# Altium PCB Digital_Input_PCB.PcbDoc (part 3 of 3)
Units mil, origin at the board's own origin, x right, y up, seen from the top; angles counter-clockwise.
Board outline 5600 x 4000 mil, 4 copper layers (Top Layer, Plane(Gnd), Plane(Power), Bottom Layer), stack 23.756 mil thick; 260 components, 287 nets, 712 pads, 291 vias.
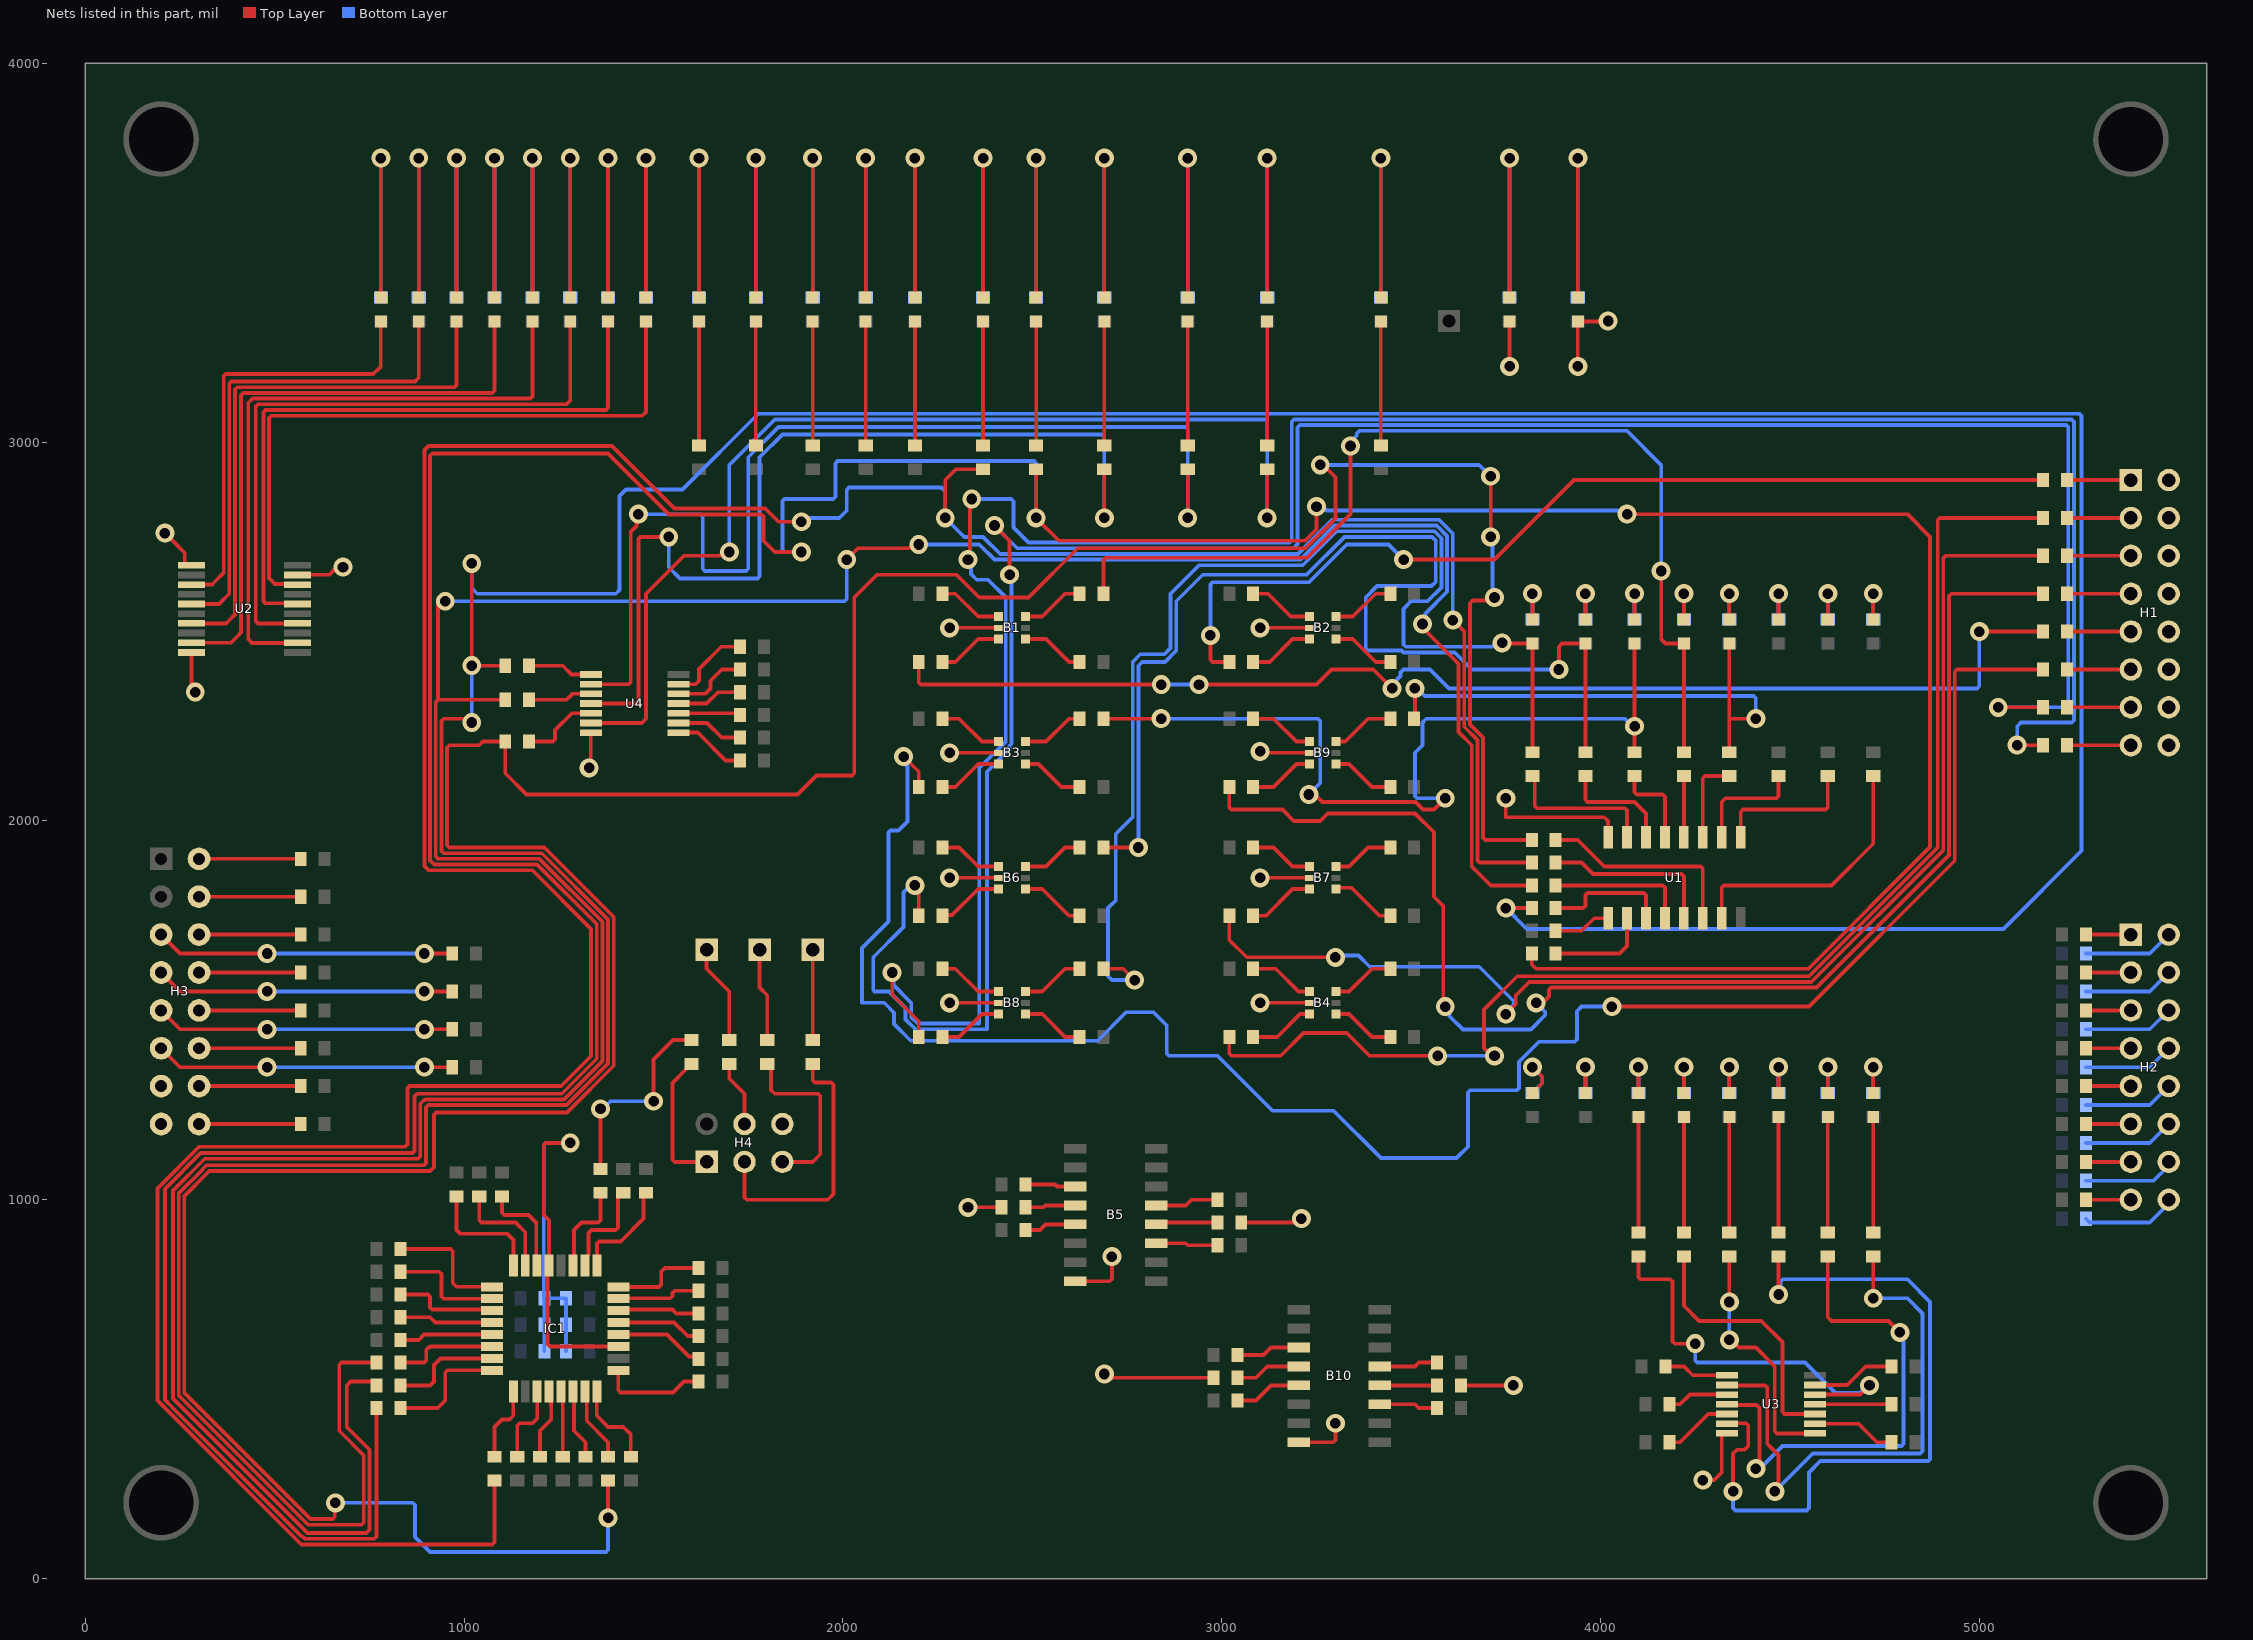
[diagram p4: the nets of this part, all layers, seen from the top]

## Via types
v1: diameter 50, hole 28, Top Layer to Bottom Layer, 291 vias

## Nets (pads, with @x,y where several pads share a name; then routed paths per layer and width w, separated by ;. In a path a pad name is that pad's centre, name@x,y a point inside that pad or via, vN(x,y) a via of type N, cw(c..) or ccw(c..) an arc to the next point about the centre after c; other vN are vias at no path point) (continued)
Digital_Input_Source_3: LED13.1 R62.2 R116.2 | length 1402.7
  Top Layer w10: R62.2@3507.99,2270 3510,2272.01 v1(3510,2350) ; R116.2@4340,2181.5 4340,2270 ; LED13.1@4340,2468.5 4340,2270 ; v1(4410,2270) 4340,2270
  Bottom Layer w10: v1(3510,2350) 3515.86,2350 3535.86,2330 4404.14,2330 4410,2324.14 v1(4410,2270)
Digital_Input_Source_4: LED12.1 R15.2 R118.2 | length 2666.4
  Top Layer w10: R15.2@2687.99,2600 2687.99,2689.14 2693.85,2695 3225,2695 3340,2810 v1(3340,2990) ; v1(4160,2660) 4160,2480 4171.5,2468.5 LED12.1@4220,2468.5 R118.2@4220,2181.5
  Bottom Layer w10: v1(3340,2990) 3340,3000.82 3356.57,3017.39 3356.57,3022.93 3363.64,3030 4070,3030 4160,2940 v1(4160,2660)
Digital_Input_Source_5: LED11.1 R39.2 R120.2 | length 2314.3
  Top Layer w10: R39.2@2687.99,2270 v1(2840,2270) ; v1(3230,2070) 3237.65,2062.35 3253.51,2062.35 3265.86,2050 3511.21,2050 3531.21,2030 3560,2030 v1(3590,2060) ; R120.2@4090,2181.5 LED11.1@4090,2468.5
  Bottom Layer w10: v1(2840,2270) 3254.14,2270 3260,2264.14 3260,2100 v1(3230,2070) ; v1(3590,2060) 3515.86,2060 3510,2065.86 3510,2180 3530,2200 3530,2260 3540,2270 4064.14,2270 4084.14,2250 v1(4090,2250)
Digital_Input_Source_6: LED10.1 R49.2 R122.2 | length 2981.9
  Top Layer w10: R49.2@2687.99,1930 2760,1930 2765.86,1935.86 2774.14,1935.86 v1(2780,1930) ; v1(3890,2400) 3890,2460 3898.5,2468.5 LED10.1@3960,2468.5 R122.2@3960,2181.5
  Bottom Layer w10: v1(2780,1930) 2780,2410 2790,2420 2850,2420 2880,2450 2880,2580 2950,2650 3223.64,2650 3323.64,2750 3555.15,2750 3565,2740.15 3565,2630.86 3554.14,2620 3410,2620 3380,2590 3380,2455.86 3385.86,2450 3474.64,2450 3479.64,2445 3615,2445 3660,2400 v1(3890,2400)
Digital_Input_Source_7: LED9.1 R61.2 R123.2 | length 3057
  Top Layer w10: R61.2@2687.99,1610 2740,1610 v1(2770,1580) ; v1(3740,2470) 3741.5,2468.5 LED9.1@3820,2468.5 R123.2@3820,2181.5
  Bottom Layer w10: v1(2770,1580) 2710,1580 2700,1590 2700,1770 2720,1790 2720,1965.43 2765,2010.43 2765,2420 2785,2440 2848.79,2440 2865,2456.21 2865,2600 2940,2675 3213.79,2675 3303.79,2765 3561.36,2765 3580,2746.36 3580,2616.46 3543.54,2580 3500,2580 3480,2560 3480,2465.86 3485.86,2460 3714.14,2460 3716.49,2462.35 3732.35,2462.35 v1(3740,2470)
GND: B1.2 B2.2 B3.2 B4.2 B5.8 B6.2 B7.2 B8.2 B9.2 B10.8 C1.2 C2.2 C3.2 C4.2 C5.2 C6.2 H1.2 H1.4 H1.6 H1.8 H1.10 H1.12 H1.14 H1.16 H3.13 H3.15 H4.6 IC1.19 IC1.29 LED25.1 LED26.1 R53.2 R54.2 R67.2 R68.2 U1.8 U2.1 U2.10 U2.19 U3.7 U4.7 | length 4954.2
  Top Layer w10: v1@227.16,2742.84 262.24,2707.76 262.24,2679.02 266.09,2675.16 U2.1@280.24,2675.16 ; U2.10@280.24,2444.84 280.24,2360.59 290,2350.82 v1(290,2340) ; U2.19@559.76,2649.57 560.2,2650 644.14,2650 656.49,2662.35 672.35,2662.35 v1(680,2670) ; v1(1280,1150) 1215.86,1150 1210,1144.14 1210,960 1224.25,945.75 IC1.29@1224.25,826.85 1220,822.6 1220,618.61 1225.86,612.76 IC1.19@1406.85,612.76 ; v1(1330,2140) 1334.33,2144.33 U4.7@1334.33,2233.23 ; v1@2266.5,1520 v1(2281.5,1520) B8.2@2411.06,1520 ; v1(2281.5,1850) B6.2@2411.06,1850 ; v1(2281.5,2180) B3.2@2411.06,2180 ; v1(2281.5,2510) B1.2@2411.06,2510 ; v1(2330,980) R53.2@2418.5,980 ; B5.8@2613.23,785 2704.14,785 2710,790.86 v1(2710,850) ; v1(2690,540) 2700.82,540 2710.82,530 R67.2@2978.5,530 ; R54.2@3051.5,940 3190,940 3190.86,939.14 3201.72,950 v1(3210,950) ; v1@3086.5,1850 v1(3101.5,1850) B7.2@3231.06,1850 ; v1(3101.5,1520) B4.2@3231.06,1520 ; v1(3101.5,2183.7) 3105.2,2180 B9.2@3231.06,2180 ; v1(3101.5,2510) B2.2@3231.06,2510 ; B10.8@3200,360 3294.14,360 3300,365.86 v1(3300,410) ; R68.2@3631.5,510 v1(3770,510) ; v1(3750,2060) 3750,2010 4010,2010 4020,2000 U1.8@4020,1956.77 ; v1(3760,3200) LED26.1@3760,3318.5 ; v1(3940,3200) LED25.1@3940,3318.5 4008.5,3318.5 4010,3320 v1(4020,3320) ; v1(4270,260) 4300,260 4320,280 4320,379.37 4323.86,383.23 U3.7@4334.33,383.23
  Bottom Layer w10: C5.2@1211.5,600 C3.2@1211.5,670 C4.2@1211.5,740 ; C2.2@1268.5,600 C6.2@1268.5,670 C1.2@1268.5,740 C4.2@1211.5,740 ; v1(1280,1150) 1215.86,1150 1210,1144.14 1210,741.5 C4.2@1211.5,740
  other v1: 210,2760
NetB1_1: B1.1 R11.1 | length 173.1
  Top Layer w10: R11.1@2262.99,2600 2296.5,2600 2356.97,2539.53 B1.1@2411.06,2539.53
NetB1_3: B1.3 R9.1 | length 173.1
  Top Layer w10: R9.1@2262.99,2420 2296.5,2420 2356.97,2480.47 B1.3@2411.06,2480.47
NetB1_4: B1.4 R13.2 | length 168.1
  Top Layer w10: B1.4@2481.93,2480.47 2536.02,2480.47 2596.5,2420 R13.2@2625,2420
NetB1_6: B1.6 R15.1 | length 168.1
  Top Layer w10: B1.6@2481.93,2539.53 2526.02,2539.53 2586.5,2600 R15.1@2625,2600
NetB2_1: B2.1 R12.1 | length 173.1
  Top Layer w10: R12.1@3082.99,2600 3122.35,2600 3182.35,2540 3230.59,2540 B2.1@3231.06,2539.53
NetB2_3: B2.3 R10.1 | length 173.1
  Top Layer w10: R10.1@3082.99,2420 3126.5,2420 3186.97,2480.47 B2.3@3231.06,2480.47
NetB2_4: B2.4 R14.2 | length 168.1
  Top Layer w10: B2.4@3301.93,2480.47 3346.02,2480.47 3406.5,2420 R14.2@3445,2420
NetB2_6: B2.6 R16.1 | length 168.1
  Top Layer w10: B2.6@3301.93,2539.53 3346.02,2539.53 3406.5,2600 R16.1@3445,2600
NetB3_1: B3.1 R35.1 | length 173.1
  Top Layer w10: R35.1@2262.99,2270 2306.5,2270 2366.97,2209.53 B3.1@2411.06,2209.53
NetB3_3: B3.3 R31.1 | length 173.1
  Top Layer w10: R31.1@2262.99,2090 2296.5,2090 2356.97,2150.47 B3.3@2411.06,2150.47
NetB3_4: B3.4 R37.2 | length 168.1
  Top Layer w10: B3.4@2481.93,2150.47 2516.02,2150.47 2576.5,2090 R37.2@2625,2090
NetB3_6: B3.6 R39.1 | length 168.1
  Top Layer w10: B3.6@2481.93,2209.53 2536.02,2209.53 2596.5,2270 R39.1@2625,2270
NetB4_1: B4.1 R36.1 | length 173.1
  Top Layer w10: R36.1@3082.99,1610 3093.74,1610 3142.35,1610 3202.83,1549.53 B4.1@3231.06,1549.53
NetB4_3: B4.3 R32.1 | length 173.1
  Top Layer w10: R32.1@3082.99,1430 3146.5,1430 3206.97,1490.47 B4.3@3231.06,1490.47
NetB4_4: B4.4 R38.2 | length 168.1
  Top Layer w10: B4.4@3301.93,1490.47 3336.02,1490.47 3396.5,1430 R38.2@3445,1430
NetB4_6: B4.6 R40.1 | length 168.1
  Top Layer w10: B4.6@3301.93,1549.53 3336.02,1549.53 3396.5,1610 R40.1@3445,1610
NetB5_3: B5.3 R41.2 | length 133.8
  Top Layer w10: R41.2@2481.5,1040 2560,1040 2565,1035 B5.3@2613.23,1035
NetB5_4: B5.4 R53.1 | length 133.8
  Top Layer w10: R53.1@2481.5,980 2530,980 2535,985 B5.4@2613.23,985
NetB5_5: B5.5 R46.2 | length 137.9
  Top Layer w10: R46.2@2481.5,920 2520,920 2535,935 B5.5@2613.23,935
NetB5_11: B5.11 R51.2 | length 163.8
  Top Layer w10: B5.11@2826.77,885 2905,885 2910,880 R51.2@2988.5,880
NetB5_12: B5.12 R54.1 | length 163.8
  Top Layer w10: B5.12@2826.77,935 2831.77,940 R54.1@2988.5,940
NetB5_13: B5.13 R52.2 | length 167.9
  Top Layer w10: B5.13@2826.77,985 2905,985 2920,1000 R52.2@2988.5,1000
NetB6_1: B6.1 R44.1 | length 169
  Top Layer w10: R44.1@2262.99,1930 2306.5,1930 2356.97,1879.53 B6.1@2411.06,1879.53
NetB6_3: B6.3 R42.1 | length 177.3
  Top Layer w10: R42.1@2262.99,1750 2264.38,1751.39 2287.88,1751.39 2356.97,1820.47 B6.3@2411.06,1820.47
NetB6_4: B6.4 R47.2 | length 172.3
  Top Layer w10: B6.4@2481.93,1820.47 2526.02,1820.47 2596.5,1750 R47.2@2625,1750
NetB6_6: B6.6 R49.1 | length 164
  Top Layer w10: B6.6@2481.93,1879.53 2536.02,1879.53 2586.5,1930 R49.1@2625,1930
NetB7_1: B7.1 R45.1 | length 169
  Top Layer w10: R45.1@3082.99,1930 3136.5,1930 3186.97,1879.53 B7.1@3231.06,1879.53
NetB7_3: B7.3 R43.1 | length 177.3
  Top Layer w10: R43.1@3082.99,1750 3116.5,1750 3186.97,1820.47 B7.3@3231.06,1820.47
NetB7_4: B7.4 R48.2 | length 174.9
  Top Layer w10: B7.4@3301.93,1820.47 3305.07,1823.61 3342.88,1823.61 3416.5,1750 R48.2@3445,1750
NetB7_6: B7.6 R50.1 | length 164
  Top Layer w10: B7.6@3301.93,1879.53 3336.02,1879.53 3386.5,1930 R50.1@3445,1930
NetB8_1: B8.1 R57.1 | length 173.1
  Top Layer w10: R57.1@2262.99,1610 2296.5,1610 2356.97,1549.53 B8.1@2411.06,1549.53
NetB8_3: B8.3 R55.1 | length 173.1
  Top Layer w10: R55.1@2262.99,1430 2306.5,1430 2366.97,1490.47 B8.3@2411.06,1490.47
NetB8_4: B8.4 R59.2 | length 168.1
  Top Layer w10: B8.4@2481.93,1490.47 2526.02,1490.47 2586.5,1430 R59.2@2625,1430
NetB8_6: B8.6 R61.1 | length 168.1
  Top Layer w10: B8.6@2481.93,1549.53 2526.02,1549.53 2586.5,1610 R61.1@2625,1610
NetB9_1: B9.1 R58.1 | length 173.1
  Top Layer w10: R58.1@3082.99,2270 3136.5,2270 3196.97,2209.53 B9.1@3231.06,2209.53
NetB9_3: B9.3 R56.1 | length 173.1
  Top Layer w10: R56.1@3082.99,2090 3136.5,2090 3196.97,2150.47 B9.3@3231.06,2150.47
NetB9_4: B9.4 R60.2 | length 168.1
  Top Layer w10: B9.4@3301.93,2150.47 3336.02,2150.47 3396.5,2090 R60.2@3445,2090
NetB9_6: B9.6 R62.1 | length 168.1
  Top Layer w10: B9.6@3301.93,2209.53 3326.02,2209.53 3386.5,2270 R62.1@3445,2270
NetB10_3: B10.3 R63.2 | length 166.8
  Top Layer w10: R63.2@3041.5,590 3110,590 3130,610 B10.3@3200,610
NetB10_4: B10.4 R67.1 | length 174.2
  Top Layer w10: R67.1@3041.5,530 3090,530 3120,560 B10.4@3203.23,560
NetB10_5: B10.5 R64.2 | length 178.3
  Top Layer w10: R64.2@3041.5,470 3090,470 3130,510 B10.5@3203.23,510
NetB10_11: B10.11 R65.2 | length 159.1
  Top Layer w10: B10.11@3413.54,460 3510,460 3520,450 R65.2@3568.5,450
NetB10_12: B10.12 R68.1 | length 155
  Top Layer w10: B10.12@3413.54,510 R68.1@3568.5,510
NetB10_13: B10.13 R66.2 | length 159.1
  Top Layer w10: B10.13@3413.54,560 3510,560 3520,570 R66.2@3568.5,570
NetH1_1: H1.1 R1.2 | length 168.5
  Top Layer w10: R1.2@5231.5,2900 H1.1@5400,2900
NetH1_3: H1.3 R2.2 | length 168.5
  Top Layer w10: R2.2@5231.5,2800 H1.3@5400,2800
NetH1_5: H1.5 R3.2 | length 168.5
  Top Layer w10: R3.2@5231.5,2700 H1.5@5400,2700
NetH1_7: H1.7 R4.2 | length 168.5
  Top Layer w10: R4.2@5231.5,2600 H1.7@5400,2600
NetH1_9: H1.9 R5.2 | length 168.5
  Top Layer w10: R5.2@5231.5,2500 H1.9@5400,2500
NetH1_11: H1.11 R6.2 | length 168.5
  Top Layer w10: R6.2@5231.5,2400 H1.11@5400,2400
NetH1_13: H1.13 R7.2 | length 168.5
  Top Layer w10: R7.2@5231.5,2300 H1.13@5400,2300
NetH1_15: H1.15 R8.2 | length 168.5
  Top Layer w10: R8.2@5231.5,2200 H1.15@5400,2200
NetH2_1: H2.1 R17.2 | length 118.5
  Top Layer w10: R17.2@5281.5,1700 H2.1@5400,1700
NetH2_2: H2.2 R18.1 | length 239.2
  Bottom Layer w10: R18.1@5281.5,1650 5450,1650 H2.2@5500,1700
NetH2_3: H2.3 R19.2 | length 118.5
  Top Layer w10: R19.2@5281.5,1600 H2.3@5400,1600
NetH2_4: H2.4 R20.1 | length 239.2
  Bottom Layer w10: R20.1@5281.5,1550 5450,1550 H2.4@5500,1600
NetH2_5: H2.5 R21.2 | length 118.5
  Top Layer w10: R21.2@5281.5,1500 H2.5@5400,1500
NetH2_6: H2.6 R22.1 | length 239.2
  Bottom Layer w10: R22.1@5281.5,1450 5450,1450 H2.6@5500,1500
NetH2_7: H2.7 R23.2 | length 118.5
  Top Layer w10: R23.2@5281.5,1400 H2.7@5400,1400
NetH2_8: H2.8 R24.1 | length 239.2
  Bottom Layer w10: R24.1@5281.5,1350 5450,1350 H2.8@5500,1400
NetH2_9: H2.9 R25.2 | length 118.5
  Top Layer w10: R25.2@5281.5,1300 H2.9@5400,1300
NetH2_10: H2.10 R26.1 | length 239.2
  Bottom Layer w10: R26.1@5281.5,1250 5450,1250 H2.10@5500,1300
NetH2_11: H2.11 R27.2 | length 118.5
  Top Layer w10: R27.2@5281.5,1200 H2.11@5400,1200
NetH2_12: H2.12 R28.1 | length 239.2
  Bottom Layer w10: R28.1@5281.5,1150 5450,1150 H2.12@5500,1200
NetH2_13: H2.13 R29.2 | length 118.5
  Top Layer w10: R29.2@5281.5,1100 H2.13@5400,1100
NetH2_14: H2.14 R30.1 | length 245.1
  Bottom Layer w10: R30.1@5281.5,1050 5460,1050 5500,1090 H2.14@5500,1100
NetH2_15: H2.15 R33.2 | length 118.5
  Top Layer w10: R33.2@5281.5,1000 H2.15@5400,1000
NetH2_16: H2.16 R34.1 | length 262.5
  Bottom Layer w10: R34.1@5281.5,950 5291.5,940 5450,940 5500,990 H2.16@5500,1000 H2.16@5493.51,993.51
NetH3_2: H3.2 R69.2 | length 268.5
  Top Layer w10: H3.2@300,1900 R69.2@568.5,1900
NetH3_4: H3.4 R71.2 | length 268.5
  Top Layer w10: H3.4@300,1800 R71.2@568.5,1800
NetH3_5: H3.5 R75.1 | length 789.2
  Top Layer w10: H3.5@200,1700 250,1650 v1(480,1650) ; v1(895,1650) R75.1@968.5,1650
  Bottom Layer w10: v1(480,1650) v1(895,1650)
NetH3_6: H3.6 R74.2 | length 268.5
  Top Layer w10: H3.6@300,1700 R74.2@568.5,1700
NetH3_7: H3.7 R78.1 | length 789.9
  Top Layer w10: H3.7@200,1600 250,1550 460,1550 460.86,1549.14 469.14,1549.14 470,1550 v1(480,1550) ; v1(895,1550) R78.1@968.5,1550
  Bottom Layer w10: v1(480,1550) v1(895,1550)
NetH3_8: H3.8 R77.2 | length 268.5
  Top Layer w10: H3.8@300,1600 R77.2@568.5,1600
NetH3_9: H3.9 R80.1 | length 789.2
  Top Layer w10: H3.9@200,1500 250,1450 v1(480,1450) ; v1(895,1450) R80.1@968.5,1450
  Bottom Layer w10: v1(480,1450) v1(895,1450)
NetH3_10: H3.10 R79.2 | length 268.5
  Top Layer w10: H3.10@300,1500 R79.2@568.5,1500
NetH3_11: H3.11 R82.1 | length 789.2
  Top Layer w10: H3.11@200,1400 250,1350 v1(480,1350) ; v1(895,1350) R82.1@968.5,1350
  Bottom Layer w10: v1(480,1350) v1(895,1350)
NetH3_12: H3.12 R81.2 | length 268.5
  Top Layer w10: H3.12@300,1400 R81.2@568.5,1400
NetH3_14: H3.14 R83.2 | length 268.5
  Top Layer w10: H3.14@300,1300 R83.2@568.5,1300
NetH3_16: H3.16 R84.2 | length 268.5
  Top Layer w10: H3.16@300,1200 R84.2@568.5,1200
NetH4_1: H4.1 R70.2 | length 367.5
  Top Layer w10: R70.2@1600,1358.5 1597.05,1358.5 1586.3,1347.76 1586.3,1344.8 1550,1308.5 1550,1105.86 1555.86,1100 H4.1@1640,1100
NetH4_3: H4.3 R72.2 | length 726.1
  Top Layer w10: H4.3@1740,1096.72 1740,1005.86 1745.86,1000 1960,1000 1975,1015 1975,1303.39 1969.14,1309.25 1925.86,1309.25 1920,1315.11 R72.2@1920,1358.5
NetH4_4: H4.4 R73.1 | length 175.1
  Top Layer w10: R73.1@1700,1358.5 1700,1320 1740,1280 H4.4@1740,1200
NetH4_5: H4.5 R76.2 | length 472.5
  Top Layer w10: R76.2@1800,1358.5 1810,1348.5 1810,1290 1820,1280 1934.14,1280 1940,1274.14 1940,1120 1920,1100 H4.5@1840,1100 ; H4.5@1829.77,1090.61 H4.5@1830.39,1090
NetIC1_1: IC1.1 R91.2 | length 332.3
  Top Layer w10: R91.2@831.5,870 964.14,870 970,864.14 970,780 979.76,770.24 IC1.1@1073.15,770.24
NetIC1_2: IC1.2 R93.2 | length 306.1
  Top Layer w10: R93.2@831.5,810 934.14,810 940,804.14 940,744.6 945.86,738.74 IC1.2@1073.15,738.74
NetIC1_3: IC1.3 R95.2 | length 275.9
  Top Layer w10: R95.2@831.5,750 904.14,750 910,744.14 910,715.86 915.86,710 1070.39,710 IC1.3@1073.15,707.24
NetIC1_4: IC1.4 R97.2 | length 247.6
  Top Layer w10: R97.2@831.5,690 910,690 924.25,675.75 IC1.4@1073.15,675.75
NetIC1_5: IC1.5 R99.2 | length 247.6
  Top Layer w10: R99.2@831.5,630 880,630 894.25,644.25 IC1.5@1073.15,644.25
NetIC1_6: IC1.6 R102.2 | length 275.9
  Top Layer w10: R102.2@831.5,570 894.14,570 900,575.86 900,604.14 905.86,610 908.28,610 911.04,612.76 IC1.6@1073.15,612.76
NetIC1_7: IC1.7 R104.2 | length 297
  Top Layer w10: R104.2@831.5,510 910,510 920,520 920,564.14 937.12,581.26 IC1.7@1073.15,581.26
NetIC1_8: IC1.8 R106.2 | length 326.3
  Top Layer w10: R106.2@831.5,450 930,450 950,470 950,543.91 955.86,549.76 IC1.8@1073.15,549.76
NetIC1_9: IC1.9 R108.2 | length 204
  Top Layer w10: R108.2@1080,321.5 1080,400 1100,420 1120,420 1129.76,429.76 IC1.9@1129.76,493.15
NetIC1_11: IC1.11 R111.1 | length 213.5
  Top Layer w10: R111.1@1140,321.5 1140,404.14 1145.86,410 1180,410 1192.76,422.76 IC1.11@1192.76,493.15
NetIC1_12: IC1.12 R110.1 | length 186.5
  Top Layer w10: R110.1@1200,321.5 1200,390 1230,420 1230,456.84 1228.94,457.9 1228.94,488.46 IC1.12@1224.25,493.15
NetIC1_13: IC1.13 R109.1 | length 173.4
  Top Layer w10: IC1.13@1255.75,493.15 1260,488.9 R109.1@1260,321.5
NetIC1_14: IC1.14 R107.1 | length 185.2
  Top Layer w10: IC1.14@1287.24,493.15 1290,490.39 1290,390 1320,360 R107.1@1320,321.5
NetIC1_15: IC1.15 R105.1 | length 197
  Top Layer w10: IC1.15@1318.74,493.15 1323.43,488.46 1323.43,416.57 1380,360 R105.1@1380,321.5
NetIC1_16: IC1.16 R103.1 | length 232.3
  Top Layer w10: IC1.16@1350.24,493.15 1350.24,429.76 1380,400 1420,400 1440,380 R103.1@1440,321.5
NetIC1_17: IC1.17 R101.1 | length 278.3
  Top Layer w10: IC1.17@1406.85,549.76 1406.85,497.35 1412.71,491.5 1551.5,491.5 1580,520 R101.1@1618.5,520
NetIC1_20: IC1.20 R100.1 | length 238.3
  Top Layer w10: IC1.20@1406.85,644.25 1535.75,644.25 1593.61,586.39 1612.12,586.39 R100.1@1618.5,580
NetIC1_21: IC1.21 R98.1 | length 226.5
  Top Layer w10: IC1.21@1406.85,675.75 1554.25,675.75 1590,640 R98.1@1618.5,640
NetIC1_22: IC1.22 R96.1 | length 216.9
  Top Layer w10: IC1.22@1406.85,707.24 1409.61,710 1550,710 1560,700 R96.1@1618.5,700
NetIC1_23: IC1.23 R94.1 | length 225.3
  Top Layer w10: IC1.23@1406.85,738.74 1408.11,740 1544.14,740 1550,745.86 1550,754.14 1555.86,760 R94.1@1618.5,760
NetIC1_24: IC1.24 R92.1 | length 252.5
  Top Layer w10: IC1.24@1406.85,770.24 1407.09,770 1514.14,770 1520,775.86 1520,810 1530,820 R92.1@1618.5,820
NetIC1_25: IC1.25 R90.1 | length 263.4
  Top Layer w10: IC1.25@1350.24,840.99 1350.61,841.36 1350.61,884.14 1356.46,890 1413.39,890 1473.61,950.23 1473.61,1010.87 R90.1@1480,1017.25
NetIC1_26: IC1.26 R88.1 | length 273.5
  Top Layer w10: IC1.26@1318.74,826.85 1318.74,844.07 1328.43,853.76 1328.43,912.57 1335.86,920 1400,920 1406.3,926.3 1406.3,1007.76 1418.54,1020 R88.1@1420,1020
NetIC1_27: IC1.27 R86.1 | length 247.6
  Top Layer w10: IC1.27@1287.24,826.85 1290,829.61 1290,920 1310,940 1354.14,940 1360,945.86 R86.1@1360,1018.5
NetIC1_30: IC1.30 R85.2 | length 257.6
  Top Layer w10: R85.2@1100,1008.5 1100,965.86 1105.86,960 1170,960 1190,940 1190,829.61 IC1.30@1192.76,826.85
NetIC1_31: IC1.31 R87.2 | length 284.3
  Top Layer w10: R87.2@1040,1008.5 1040,945.86 1045.86,940 1135.4,940 1161.26,914.14 IC1.31@1161.26,826.85
NetIC1_32: IC1.32 R89.2 | length 316.6
  Top Layer w10: R89.2@980,1008.5 980,920 990,910 1114.14,910 1130,894.14 1130,827.09 IC1.32@1129.76,826.85
NetLED1_1: LED1.1 U2.18 | length 1745.1
  Top Layer w10: U2.18@559.76,2623.98 558.03,2625.71 500.15,2625.71 490,2635.86 485,2640.86 485,3064.14 490.86,3070 1470,3070 1480,3080 LED1.1@1480,3318.5
NetLED1_2: LED1.2 R126.1 | length 737
  Top Layer w10: LED1.2@1480,3381.5 v1(1480,3750)
  Bottom Layer w10: R126.1@1480,3381.5 v1(1480,3750)
NetLED2_1: LED2.1 U2.16 | length 1734.2
  Top Layer w10: U2.16@559.76,2572.8 558.03,2574.53 475.86,2574.53 470,2580.39 470,3079.14 475.86,3085 1374.14,3085 1380,3090.86 LED2.1@1380,3318.5
NetLED2_2: LED2.2 R127.1 | length 737
  Top Layer w10: LED2.2@1380,3381.5 v1(1380,3750)
  Bottom Layer w10: R127.1@1380,3381.5 v1(1380,3750)
NetLED3_1: LED3.1 U2.14 | length 1723.9
  Top Layer w10: U2.14@559.76,2521.61 455.86,2521.61 450,2527.47 450,3094.14 455.86,3100 1270,3100 1280,3110 LED3.1@1280,3318.5
NetLED3_2: LED3.2 R128.1 | length 737
  Top Layer w10: LED3.2@1280,3381.5 v1(1280,3750)
  Bottom Layer w10: R128.1@1280,3381.5 v1(1280,3750)
NetLED4_1: LED4.1 U2.12 | length 1723.8
  Top Layer w10: U2.12@570,2472.17 567.83,2470 440,2470 430,2480 430,3104.14 440.86,3115 1174.14,3115 1180,3120.86 LED4.1@1180,3318.5
NetLED4_2: LED4.2 R129.1 | length 737
  Top Layer w10: LED4.2@1180,3381.5 v1(1180,3750)
  Bottom Layer w10: R129.1@1180,3381.5 v1(1180,3750)
NetLED5_1: LED5.1 U2.9 | length 1625.3
  Top Layer w10: U2.9@280.24,2470.43 384.14,2470.43 400,2486.29 410.86,2497.15 410.86,3124.14 416.72,3130 1074.14,3130 1080,3135.86 LED5.1@1080,3318.5
NetLED5_2: LED5.2 R130.1 | length 737
  Top Layer w10: LED5.2@1080,3381.5 v1(1080,3750)
  Bottom Layer w10: R130.1@1080,3381.5 v1(1080,3750)
NetLED6_1: LED6.1 U2.7 | length 1476.1
  Top Layer w10: U2.7@280.24,2521.61 371.61,2521.61 380,2530 395,2545 395,3139.14 400.86,3145 974.14,3145 980,3150.86 LED6.1@980,3318.5
NetLED6_2: LED6.2 R131.1 | length 737
  Top Layer w10: LED6.2@980,3381.5 v1(980,3750)
  Bottom Layer w10: R131.1@980,3381.5 v1(980,3750)
NetLED7_1: LED7.1 U2.5 | length 1320.2
  Top Layer w10: U2.5@280.24,2572.8 352.8,2572.8 356.4,2576.4 380,2600 380,3154.14 385.86,3160 870,3160 880,3170 LED7.1@880,3318.5
NetLED7_2: LED7.2 R132.1 | length 737
  Top Layer w10: LED7.2@880,3381.5 v1(880,3750)
  Bottom Layer w10: R132.1@880,3381.5 v1(880,3750)
NetLED8_1: LED8.1 U2.3 | length 1161
  Top Layer w10: U2.3@280.24,2623.98 333.98,2623.98 340,2630 365,2655 365,3174.14 370.86,3180 760,3180 780,3200 LED8.1@780,3318.5
NetLED8_2: LED8.2 R133.1 | length 737
  Top Layer w10: LED8.2@780,3381.5 v1(780,3750)
  Bottom Layer w10: R133.1@780,3381.5 v1(780,3750)
NetLED9_2: LED9.2 R134.1 | length 137
  Top Layer w10: LED9.2@3820,2531.5 v1(3820,2600)
  Bottom Layer w10: R134.1@3820,2531.5 v1(3820,2600)
NetLED10_2: LED10.2 R135.1 | length 137
  Top Layer w10: LED10.2@3960,2531.5 v1(3960,2600)
  Bottom Layer w10: R135.1@3960,2531.5 v1(3960,2600)
NetLED11_2: LED11.2 R136.1 | length 137
  Top Layer w10: LED11.2@4090,2531.5 v1(4090,2600)
  Bottom Layer w10: R136.1@4090,2531.5 v1(4090,2600)
NetLED12_2: LED12.2 R137.1 | length 137
  Top Layer w10: LED12.2@4220,2531.5 v1(4220,2600)
  Bottom Layer w10: R137.1@4220,2531.5 v1(4220,2600)
NetLED13_2: LED13.2 R138.1 | length 137
  Top Layer w10: LED13.2@4340,2531.5 v1(4340,2600)
  Bottom Layer w10: R138.1@4340,2531.5 v1(4340,2600)
NetLED14_2: LED14.2 R139.1 | length 137
  Top Layer w10: LED14.2@4470,2531.5 v1(4470,2600)
  Bottom Layer w10: R139.1@4470,2531.5 v1(4470,2600)
NetLED15_2: LED15.2 R140.1 | length 137
  Top Layer w10: LED15.2@4600,2531.5 v1(4600,2600)
  Bottom Layer w10: R140.1@4600,2531.5 v1(4600,2600)
NetLED16_2: LED16.2 R141.1 | length 127
  Top Layer w10: LED16.2@4720,2531.5 v1@4720,2590
  Bottom Layer w10: R141.1@4720,2531.5 v1(4720,2600)
NetLED17_1: LED17.1 R157.1 | length 327
  Top Layer w10: R157.1@2370,2991.5 LED17.1@2370,3318.5
NetLED17_2: LED17.2 R142.1 | length 737
  Top Layer w10: LED17.2@2370,3381.5 v1(2370,3750)
  Bottom Layer w10: R142.1@2370,3381.5 v1(2370,3750)
NetLED18_1: LED18.1 R156.1 | length 327
  Top Layer w10: R156.1@2510,2991.5 LED18.1@2510,3318.5
NetLED18_2: LED18.2 R143.1 | length 737
  Top Layer w10: LED18.2@2510,3381.5 v1(2510,3750)
  Bottom Layer w10: R143.1@2510,3381.5 v1(2510,3750)
NetLED19_1: LED19.1 R155.1 | length 327
  Top Layer w10: R155.1@3420,2991.5 LED19.1@3420,3318.5
NetLED19_2: LED19.2 R144.1 | length 737
  Top Layer w10: LED19.2@3420,3381.5 v1(3420,3750)
  Bottom Layer w10: R144.1@3420,3381.5 v1(3420,3750)
NetLED20_1: LED20.1 R154.1 | length 327
  Top Layer w10: R154.1@1770,2991.5 LED20.1@1770,3318.5
NetLED20_2: LED20.2 R145.1 | length 737
  Top Layer w10: LED20.2@1770,3381.5 v1(1770,3750)
  Bottom Layer w10: R145.1@1770,3381.5 v1(1770,3750)
NetLED21_1: LED21.1 R153.1 | length 327
  Top Layer w10: R153.1@1920,2991.5 LED21.1@1920,3318.5
NetLED21_2: LED21.2 R146.1 | length 737
  Top Layer w10: LED21.2@1920,3381.5 v1(1920,3750)
  Bottom Layer w10: R146.1@1920,3381.5 v1(1920,3750)
NetLED22_1: LED22.1 R152.1 | length 327
  Top Layer w10: R152.1@1620,2991.5 LED22.1@1620,3318.5
NetLED22_2: LED22.2 R147.1 | length 737
  Top Layer w10: LED22.2@1620,3381.5 v1(1620,3750)
  Bottom Layer w10: R147.1@1620,3381.5 v1(1620,3750)
NetLED23_1: LED23.1 R151.1 | length 327
  Top Layer w10: R151.1@2060,2991.5 LED23.1@2060,3318.5
NetLED23_2: LED23.2 R148.1 | length 737
  Top Layer w10: LED23.2@2060,3381.5 v1(2060,3750)
  Bottom Layer w10: R148.1@2060,3381.5 v1(2060,3750)
NetLED24_1: LED24.1 R150.1 | length 327
  Top Layer w10: R150.1@2190,2991.5 LED24.1@2190,3318.5
NetLED24_2: LED24.2 R149.1 | length 737
  Top Layer w10: LED24.2@2190,3381.5 v1(2190,3750)
  Bottom Layer w10: R149.1@2190,3381.5 v1(2190,3750)
NetLED25_2: LED25.2 R158.1 | length 737
  Top Layer w10: LED25.2@3940,3381.5 v1(3940,3750)
  Bottom Layer w10: R158.1@3940,3381.5 v1(3940,3750)
NetLED26_2: LED26.2 R159.1 | length 737
  Top Layer w10: LED26.2@3760,3381.5 v1(3760,3750)
  Bottom Layer w10: R159.1@3760,3381.5 v1(3760,3750)
NetLED27_2: LED27.2 R160.1 | length 181.8
  Top Layer w10: LED27.2@3820,1281.5 3846,1307.49 3846,1324 v1(3820,1350)
  Bottom Layer w10: R160.1@3820,1281.5 3822.95,1281.5 3833.7,1292.24 3833.7,1295.2 3846,1307.49 3846,1324 v1(3820,1350)
NetLED28_2: LED28.2 R161.1 | length 137
  Top Layer w10: LED28.2@3960,1281.5 v1(3960,1350)
  Bottom Layer w10: R161.1@3960,1281.5 v1(3960,1350)
NetLED29_1: LED29.1 R181.1 | length 305
  Top Layer w10: R181.1@4100,913.5 LED29.1@4100,1218.5
NetLED29_2: LED29.2 R162.1 | length 137
  Top Layer w10: LED29.2@4100,1281.5 v1(4100,1350)
  Bottom Layer w10: R162.1@4100,1281.5 v1(4100,1350)
NetLED30_1: LED30.1 R176.1 | length 305
  Top Layer w10: R176.1@4220,913.5 LED30.1@4220,1218.5
NetLED30_2: LED30.2 R163.1 | length 145.3
  Top Layer w10: LED30.2@4210,1291.5 LED30.2@4220,1281.5 ; LED30.2@4220,1291.5 v1(4220,1350)
  Bottom Layer w10: R163.1@4210,1291.5 R163.1@4220,1281.5 ; R163.1@4220,1291.5 v1(4220,1350)
NetLED31_1: LED31.1 R174.1 | length 305
  Top Layer w10: R174.1@4340,913.5 LED31.1@4340,1218.5
NetLED31_2: LED31.2 R164.1 | length 137
  Top Layer w10: LED31.2@4340,1281.5 v1(4340,1350)
  Bottom Layer w10: R164.1@4340,1281.5 v1(4340,1350)
NetLED32_1: LED32.1 R172.1 | length 305
  Top Layer w10: R172.1@4470,913.5 LED32.1@4470,1218.5
NetLED32_2: LED32.2 R165.1 | length 137
  Top Layer w10: LED32.2@4470,1281.5 v1(4470,1350)
  Bottom Layer w10: R165.1@4470,1281.5 v1(4470,1350)
NetLED33_1: LED33.1 R170.1 | length 305
  Top Layer w10: R170.1@4600,913.5 LED33.1@4600,1218.5
NetLED33_2: LED33.2 R166.1 | length 137
  Top Layer w10: LED33.2@4600,1281.5 v1(4600,1350)
  Bottom Layer w10: R166.1@4600,1281.5 v1(4600,1350)
NetLED34_1: LED34.1 R168.1 | length 305
  Top Layer w10: R168.1@4720,913.5 LED34.1@4720,1218.5
NetLED34_2: LED34.2 R167.1 | length 137
  Top Layer w10: LED34.2@4720,1281.5 v1(4720,1350)
  Bottom Layer w10: R167.1@4720,1281.5 v1(4720,1350)
NetLED35_1: LED35.1 R187.1 | length 327
  Top Layer w10: R187.1@3120,2991.5 LED35.1@3120,3318.5
NetLED35_2: LED35.2 R178.1 | length 737
  Top Layer w10: LED35.2@3120,3381.5 v1(3120,3750)
  Bottom Layer w10: R178.1@3120,3381.5 v1(3120,3750)
NetLED36_1: LED36.1 R185.1 | length 327
  Top Layer w10: R185.1@2690,2991.5 LED36.1@2690,3318.5
NetLED36_2: LED36.2 R179.1 | length 737
  Top Layer w10: LED36.2@2690,3381.5 v1(2690,3750)
  Bottom Layer w10: R179.1@2690,3381.5 v1(2690,3750)
NetLED37_1: LED37.1 R183.1 | length 327
  Top Layer w10: R183.1@2910,2991.5 LED37.1@2910,3318.5
NetLED37_2: LED37.2 R180.1 | length 737
  Top Layer w10: LED37.2@2910,3381.5 v1(2910,3750)
  Bottom Layer w10: R180.1@2910,3381.5 v1(2910,3750)
NetR72_1: R72.1 TP2.1 | length 238.5
  Top Layer w10: R72.1@1920,1421.5 TP2.1@1920,1660
NetR73_2: R73.2 TP3.1 | length 263.4
  Top Layer w10: TP3.1@1640,1660 1640,1610 1700,1550 R73.2@1700,1421.5
NetR76_1: R76.1 TP4.1 | length 246.8
  Top Layer w10: TP4.1@1780,1660 1780,1560 1800,1540 R76.1@1800,1421.5
NetR112_1: R112.1 U1.15 | length 707.4
  Top Layer w10: U1.15@4320,1743.23 4320,1824.14 4325.86,1830 4610,1830 4720,1940 R112.1@4720,2118.5
NetR113_1: R113.1 U1.1 | length 384.9
  Top Layer w10: U1.1@4370,1956.77 4370,2024.14 4375.86,2030 4594.14,2030 4600,2035.86 R113.1@4600,2118.5
NetR114_1: R114.1 U1.2 | length 302.4
  Top Layer w10: U1.2@4320,1956.77 4320,2050 4330,2060 4464.14,2060 4470,2065.86 R114.1@4470,2118.5
NetR115_2: R115.2 U1.11 | length 335
  Top Layer w10: R115.2@3881.5,1770 3954.14,1770 3960,1775.86 3960,1804.14 3965.86,1810 4114.14,1810 4120,1804.14 U1.11@4120,1743.23
NetR116_1: R116.1 U1.3 | length 228.3
  Top Layer w10: U1.3@4270,1956.77 4270,2112.65 4275.86,2118.5 R116.1@4340,2118.5
NetR117_2: R117.2 U1.12 | length 371.8
  Top Layer w10: R117.2@3881.5,1830 4164.14,1830 4170,1824.14 U1.12@4170,1743.23
NetR118_1: R118.1 U1.4 | length 161.7
  Top Layer w10: U1.4@4220,1956.77 R118.1@4220,2118.5
NetR119_2: R119.2 U1.14 | length 550.8
  Top Layer w10: R119.2@3881.5,1950 3940,1950 4010,1880 4264.14,1880 4270,1874.14 U1.14@4270,1743.23
NetR120_1: R120.1 U1.5 | length 234.9
  Top Layer w10: R120.1@4090,2118.5 4090,2075.86 4095.86,2070 4164.14,2070 4170,2064.14 U1.5@4170,1956.77
NetR121_2: R121.2 U1.13 | length 464.3
  Top Layer w10: R121.2@3881.5,1890 3950,1890 3980,1860 4214.14,1860 4220,1854.14 U1.13@4220,1743.23
NetR122_1: R122.1 U1.6 | length 300.7
  Top Layer w10: R122.1@3960,2118.5 3960,2055.86 3965.86,2050 4090,2050 4120,2020 U1.6@4120,1956.77
NetR123_1: R123.1 U1.7 | length 401.1
  Top Layer w10: R123.1@3820,2118.5 3826.39,2112.12 3826.39,2039.47 3832.24,2033.61 4064.14,2033.61 4070,2027.76 U1.7@4070,1956.77
NetR124_2: R124.2 U1.10 | length 270
  Top Layer w10: R124.2@3881.5,1650 4050,1650 4070,1670 U1.10@4070,1743.23
NetR125_1: R125.1 U1.9 | length 152.3
  Top Layer w10: R125.1@3881.5,1710 3950,1710 3983.23,1743.23 U1.9@4020,1743.23
NetR168_2: R168.2 U3.2 | length 1454.4
  Top Layer w10: U3.2@4334.33,511.18 4335.51,510 4434.14,510 4440,504.14 4440,355.86 4445.86,350 4470,325.86 4470,255.86 4467.65,253.51 4467.65,237.65 v1(4460,230) ; v1(4720,740) R168.2@4720,850.5
  Bottom Layer w10: v1(4460,230) 4560,330 4844.14,330 4850,335.86 4850,700 4810,740 v1(4720,740)
NetR169_1: R169.1 U3.1 | length 172.5
  Top Layer w10: R169.1@4171.5,560 4220,560 4243.23,536.77 U3.1@4334.33,536.77
NetR170_2: R170.2 U3.4 | length 1316.7
  Top Layer w10: U3.4@4353.46,458.27 4411.73,458.27 4420,450 4420,310.82 4410,300.82 v1(4410,290) ; R170.2@4600,850.5 4600,690 4610,680 4760,680 v1(4790,650)
  Bottom Layer w10: v1(4410,290) 4420,290 4430,300 4480,350 4794.14,350 4800,355.86 4800,624.14 4797.65,626.49 4797.65,642.35 v1(4790,650)
NetR171_1: R171.1 U3.3 | length 163.7
  Top Layer w10: R171.1@4181.5,460 4210,460 4235.86,485.86 4244.14,485.86 4244.41,485.59 U3.3@4334.33,485.59
NetR172_2: R172.2 U3.6 | length 1922.5
  Top Layer w10: U3.6@4334.33,408.82 4335.51,410 4384.14,410 4390,404.14 4390,350 4380,340 4360,340 4350,330 v1(4350,230) ; v1(4470,750) R172.2@4470,850.5
  Bottom Layer w10: v1@4357.65,222.35 v1(4350,230) 4350,185.86 4355.86,180 4544.14,180 4550,185.86 4550,280 4580,310 4864.14,310 4870,315.86 4870,320 4870,730 4810,790 4481.72,790 4475.86,784.14 4475.86,755.86 v1(4470,750)
NetR173_1: R173.1 U3.5 | length 183.7
  Top Layer w10: R173.1@4181.5,360 4210,360 4284.41,434.41 U3.5@4334.33,434.41
NetR174_2: R174.2 U3.8 | length 648.5
  Top Layer w10: v1(4340,630) 4345.86,630 4365.86,610 4410,610 4460,560 4460,389.09 4465.86,383.23 U3.8@4565.67,383.23 ; v1(4340,730) R174.2@4340,850.5
  Bottom Layer w10: v1(4340,630) v1(4340,730)
NetR175_1: R175.1 U3.9 | length 223.1
  Top Layer w10: U3.9@4565.67,408.82 4681.18,408.82 4730,360 R175.1@4768.5,360
NetR176_2: R176.2 U3.10 | length 702.2
  Top Layer w10: R176.2@4220,850.5 4220,720 4260,680 4424.19,680 4480,624.19 4480,610 4480,440.27 4485.86,434.41 U3.10@4565.67,434.41
NetR177_1: R177.1 U3.11 | length 202.8
  Top Layer w10: U3.11@4565.67,460 R177.1@4768.5,460
NetR181_2: R181.2 U3.12 | length 1072.6
  Top Layer w10: R181.2@4100,850.5 4100,795.86 4105.86,790 4184.14,790 4190,784.14 4190,625.86 4195.86,620 v1(4250,620) ; U3.12@4565.67,485.59 4685.59,485.59 v1(4710,510)
  Bottom Layer w10: v1(4250,620) 4250,575.86 4255.86,570 4540,570 4620,490 4684.14,490 4704.14,510 v1(4710,510)
NetR182_1: R182.1 U3.13 | length 223.1
  Top Layer w10: U3.13@4565.67,511.18 4651.18,511.18 4700,560 R182.1@4768.5,560
NetR183_2: R183.2 U4.2 | length 2847.3
  Top Layer w10: U4.2@1334.33,2361.18 1434.14,2361.18 1440,2367.04 1440,2764.14 1454.64,2778.79 1454.64,2804.64 v1(1460,2810) ; v1(2910,2800) R183.2@2910,2928.5
  Bottom Layer w10: v1(1460,2810) 1624.14,2810 1630,2804.14 1630,2665.86 1635.86,2660 1744.14,2660 1750,2665.86 1750,2960 1830,3040 2904.14,3040 2910,3034.14 v1(2910,2800)
NetR184_1: R184.1 U4.1 | length 178
  Top Layer w10: R184.1@1165.99,2410 1180,2410 1260,2410 1283.23,2386.77 U4.1@1334.33,2386.77
NetR185_2: R185.2 U4.4 | length 2568.4
  Top Layer w10: U4.4@1334.33,2310 1454.14,2310 1460,2315.86 1460,2744.14 1465.86,2750 v1(1540,2750) ; v1(2690,2800) R185.2@2690,2928.5
  Bottom Layer w10: v1(1540,2750) 1540,2670 1570,2640 1774.14,2640 1780,2645.86 1780,2960 1840,3020 2684.14,3020 2690,3014.14 v1@2690,2799.36
NetR186_1: R186.1 U4.3 | length 169.3
  Top Layer w10: R186.1@1171.5,2320 1270,2320 1285.59,2335.59 U4.3@1334.33,2335.59
NetR187_2: R187.2 U4.6 | length 2830.6
  Top Layer w10: U4.6@1334.33,2258.82 1468.82,2258.82 1480,2270 1480,2600 1580,2700 1674.14,2700 1676.49,2702.35 1692.35,2702.35 v1(1700,2710) ; v1(3120,2800) R187.2@3120,2928.5
  Bottom Layer w10: v1(1700,2710) 1700,2940 1820,3060 3114.14,3060 3120,3054.14 v1(3120,2800)
NetR188_1: R188.1 U4.5 | length 207.8
  Top Layer w10: R188.1@1171.5,2210 1234.14,2210 1240,2215.86 1240,2240 1284.41,2284.41 U4.5@1334.33,2284.41
NetR189_2: R189.2 U4.8 | length 193.2
  Top Layer w10: U4.8@1565.67,2233.23 1616.77,2233.23 1690,2160 R189.2@1728.5,2160
NetR190_1: R190.1 U4.9 | length 178.9
  Top Layer w10: U4.9@1565.67,2258.82 1641.18,2258.82 1680,2220 R190.1@1728.5,2220
NetR191_2: R191.2 U4.10 | length 164.7
  Top Layer w10: U4.10@1565.67,2284.41 1724.09,2284.41 R191.2@1728.5,2280
NetR192_1: R192.1 U4.11 | length 175.3
  Top Layer w10: U4.11@1565.67,2310 1640,2310 1670,2340 R192.1@1728.5,2340
NetR193_2: R193.2 U4.12 | length 201.2
  Top Layer w10: U4.12@1565.67,2335.59 1635.59,2335.59 1650,2350 1650,2370 1680,2400 R193.2@1728.5,2400
NetR194_1: R194.1 U4.13 | length 222.2
  Top Layer w10: U4.13@1565.67,2361.18 1611.18,2361.18 1620,2370 1620,2401.5 1678.5,2460 R194.1@1728.5,2460
RCLK: R104.1 R117.1 R186.2 | length 8791
  Top Layer w10: R104.1@768.5,510 768.5,518.5 770,520 700,520 690,510 690,400 750,340 750,128.79 741.21,120 586.57,120 231.21,475.36 231.21,1024.14 315.15,1108.08 878.28,1108.08 884.14,1113.94 884.14,1253.28 895.86,1265 1263.79,1265 1365,1366.21 1365,1733.79 1198.79,1900 930.86,1900 925,1905.86 925,2314.14 930.86,2320 ; v1(950,2580) 936.72,2580 930.86,2574.14 930.86,2320 ; R186.2@1108.5,2320 930.86,2320 ; v1(2010,2690) 2040,2720 2174.14,2720 2176.49,2722.35 2192.35,2722.35 v1(2200,2730) ; v1(3530,2520) 3530,2510 3625,2415 3625,2235 3660,2200 3660,1880 3710,1830 R117.1@3818.5,1830
  Bottom Layer w10: v1(950,2580) 2004.14,2580 2010,2585.86 v1(2010,2690) ; v1(2200,2730) 2360,2730 2400,2690 3207.57,2690 3297.57,2780 3567.57,2780 3595,2752.57 3595,2605 3537.65,2547.65 3537.65,2527.65 v1(3530,2520)
Ser_Data_0: R105.2 R119.1 R188.2 | length 9496.8
  Top Layer w10: v1(660,200) 658.54,198.54 658.54,162.93 652.68,157.07 594.14,157.07 261.21,490 261.21,1010 327.07,1075.86 910,1075.86 920,1085.86 920,1224.14 925.86,1230 1271.21,1230 1395,1353.79 1395,1746.21 1211.21,1930 960.86,1930 955,1935.86 955,2194.14 960.86,2200 1040,2200 1050,2210 R188.2@1108.5,2210 1108.5,2125.86 1164.36,2070 1880,2070 1930,2120 2024.14,2120 2030,2125.86 2030,2590 2090,2650 2300,2650 2360,2590 2490,2590 2620,2720 3221.21,2720 3300,2798.79 3300,2907.39 3267.39,2940 v1(3260,2940) ; v1(1380,160) R105.2@1380,258.5 ; v1(3710,2750) v1(3710,2910) ; v1(3720,2590) 3712.35,2582.35 3662.35,2582.35 3655,2575 3655,2255 3690,2220 3690,1955.86 3695.86,1950 R119.1@3818.5,1950
  Bottom Layer w10: v1(660,200) 864.14,200 870,194.14 870,110 910,70 1374.14,70 1380,75.86 v1(1380,160) ; v1(3260,2940) 3680,2940 v1(3710,2910) ; v1(3710,2750) 3715,2745 3715,2595 v1(3720,2590)
SR_CLR: R106.1 R124.1 R156.2 | length 11784.1
  Top Layer w10: R106.1@768.5,450 768.5,110.86 762.65,105 580.36,105 566.21,115 230.8,450.41 227.88,453.34 210,471.21 210,1028.79 304.29,1123.08 863.28,1123.08 869.14,1128.94 869.14,1273.28 875.86,1280 1257.57,1280 1350,1372.43 1350,1727.57 1192.57,1885 920.86,1885 910,1895.86 910,2964.14 915.86,2970 1380,2970 1540.61,2809.39 1784.14,2809.39 1790,2803.54 1790,2740 1820,2710 v1(1890,2710) ; R156.2@2510,2928.5 v1(2510,2800) 2570,2740 3220,2740 3250,2770 v1(3250,2830) ; R124.1@3818.5,1650 3818.5,1621.5 3830,1610 4548.79,1610 4870,1931.21 4870,2750 4810,2810 v1(4070,2810)
  Bottom Layer w10: v1(1890,2710) 1845.86,2710 1840,2715.86 1840,2844.14 1845.86,2850 1974.14,2850 1980,2855.86 1980,2944.14 1985.86,2950 2504.14,2950 2510,2944.14 v1(2510,2800) ; v1(3250,2830) 3257.65,2822.35 3273.51,2822.35 3275.86,2820 4044.14,2820 4046.49,2817.65 4062.35,2817.65 v1(4070,2810)
SR_OE: R108.1 R121.1 R157.2 | length 9376.8
  Top Layer w10: R108.1@1080,258.5 1080,95.86 1074.14,90 570,90 215.46,444.54 212.53,447.47 190,470 190,1030 300,1140 844.14,1140 850,1145.86 850,1294.14 855.86,1300 1256.36,1300 1335,1378.64 1335,1715 1180,1870 905.86,1870 895,1880.86 895,2979.14 905.86,2990 1390,2990 1555,2825 1795,2825 1830,2790 v1(1890,2790) ; v1(2270,2800) 2270,2900 2298.5,2928.5 R157.2@2370,2928.5 ; v1(3610,2530) 3640,2500 3640,2286.23 3640,2248.79 3675,2213.79 3675,1895.86 3680.86,1890 R121.1@3818.5,1890
  Bottom Layer w10: v1(1890,2790) 1897.65,2797.65 1913.51,2797.65 1915.86,2800 1990,2800 2010,2820 2010,2874.14 2015.86,2880 2260,2880 2270,2870 v1(2270,2800) 2320,2750 2370,2750 2415,2705 3201.36,2705 3291.36,2795 3573.79,2795 3610,2758.79 v1(3610,2530)
SRCLK: R102.1 R115.1 R184.2 | length 12416.5
  Top Layer w10: R102.1@768.5,570 675.86,570 670,564.14 670,390 735,325 735,147.93 729.14,142.07 587.93,142.07 246.21,483.79 246.21,1016.21 310,1080 310,1081.72 319.14,1090.86 893.28,1090.86 899.14,1096.72 899.14,1244.14 905,1250 1270,1250 1380,1360 1380,1740 1205,1915 945.86,1915 940,1920.86 940,2264.14 945.86,2270 1010,2270 v1(1020,2260) ; v1(1020,2680) v1(1020,2410) R184.2@1108.5,2410 ; v1(3750,1770) R115.1@3818.5,1770
  Bottom Layer w10: v1(1020,2260) v1(1020,2410) ; v1(1020,2680) 1020,2614.64 1034.64,2600 1400.36,2600 1410,2609.64 1410,2857.57 1427.43,2875 1576.21,2875 1776.21,3075 5264.14,3075 5270,3069.14 5270,1921.21 5063.79,1715 3805,1715 v1(3750,1770)
TTL_Channel_In_0: R1.1 R10.2 | length 2596.6
  Top Layer w10: v1(2970,2490) 2970,2425.86 2975.86,2420 R10.2@3020,2420 ; v1(3480,2690) 3720,2690 3930,2900 R1.1@5168.5,2900
  Bottom Layer w10: v1(2970,2490) 2970,2624.14 2975.86,2630 3230,2630 3330,2730 3440,2730 v1(3480,2690)
TTL_Channel_In_1: R2.1 R32.2 | length 3454.1
  Top Layer w10: R32.2@3020,1430 3020,1385.86 3025.86,1380 3155.86,1380 3215.86,1440 3330,1440 3390,1380 v1(3570,1380) ; v1(3720,1380) 3712.98,1380 3692.35,1400.63 3692.35,1502.35 3780,1590 4550,1590 4890,1930 4890,2794.14 4895.86,2800 R2.1@5168.5,2800
  Bottom Layer w10: v1(3570,1380) v1(3720,1380)
TTL_Channel_In_2: R3.1 R43.2 | length 3313.3
  Top Layer w10: R43.2@3020,1750 3020,1685.86 3065.86,1640 v1(3300,1640) ; v1(3750,1490) 3776,1516 3776,1539.34 3811.66,1575 4556.21,1575 4905,1923.79 4905,2694.14 4910.86,2700 R3.1@5168.5,2700
  Bottom Layer w10: v1(3300,1640) 3304.64,1644.64 3361.21,1644.64 3390.86,1615 3680,1615 3770.86,1524.14 3770.86,1515.86 3750,1495 v1(3750,1490)
TTL_Channel_In_3: R4.1 R56.2 | length 3663
  Top Layer w10: R56.2@3020,2090 3020,2035.86 3025.86,2030 3160,2030 3190,2000 3260,2000 3280,2020 3510,2020 3560,1970 3560,1800 3585,1775 3585,1515 v1(3590,1510) ; v1(3830,1520) 3837.65,1527.65 3854.31,1527.65 3863.65,1536.99 3863.65,1554.14 3869.51,1560 4570,1560 4920,1910 4920,2594.14 4925.86,2600 R4.1@5168.5,2600
  Bottom Layer w10: v1(3590,1510) 3590,1499.18 3601.21,1487.96 3601.21,1484.64 3636.52,1449.34 3816,1449.34 3854.19,1487.53 3854.19,1495.81 v1(3830,1520)
TTL_Channel_In_4: R5.1 R9.2 | length 3262.1
  Top Layer w10: R9.2@2200,2420 2200,2365.86 2205.86,2360 v1(2840.25,2360) ; v1(2940,2360) 3250,2360 3290,2400 3400,2400 v1(3450,2350) ; v1(5000,2500) R5.1@5168.5,2500
  Bottom Layer w10: v1(2840.25,2360) v1(2940,2360) ; v1(3450,2350) 3450,2360.82 3471.8,2382.62 3471.8,2391.8 3480,2400 3550,2400 3600,2350 4994.14,2350 5000,2355.86 v1(5000,2500)
TTL_Channel_In_5: R6.1 R31.2 | length 5219
  Top Layer w10: v1(2160,2170) 2200,2130 R31.2@2200,2090 ; v1(4030,1510) 4550,1510 4935,1895 4935,2394.14 4940.86,2400 R6.1@5168.5,2400
  Bottom Layer w10: v1(2160,2170) 2167.65,2162.35 2167.65,2146.49 2170,2144.14 2170,1998.79 2146.21,1975 2125.86,1975 2120,1969.14 2120,1735 2050,1665 2050,1520 2108.79,1520 2135,1493.79 2135,1463.79 2178.79,1420 2672.43,1420 2747.43,1495 2820,1495 2855,1460 2855,1385.86 2860.86,1380 2988.79,1380 3133.79,1235 3295,1235 3420,1110 3620,1110 3650,1140 3650,1283.48 3655.86,1289.34 3779.14,1289.34 3785,1295.2 3785,1364.5 3837.5,1416.99 3931.8,1416.99 3937.65,1422.85 3937.65,1497.65 3950,1510 v1(4030,1510)
TTL_Channel_In_6: R7.1 R42.2 | length 6365.5
  Top Layer w10: v1(2190,1830) 2190,1819.18 2200,1809.18 R42.2@2200,1750 ; v1(2400,2780) 2440,2740 v1(2440,2650) ; v1(5050,2300) R7.1@5168.5,2300
  Bottom Layer w10: v1(2190,1830) 2179.18,1830 2166.75,1817.57 2165.86,1817.57 2160,1811.72 2160,1720 2080,1640 2080,1553.54 2083.54,1550 2121.21,1550 2165,1506.21 2165,1476.21 2191.21,1450 2380,1450 2380,2130 2440,2190 2440,2198.79 2445,2203.79 2445,2645 v1(2440,2650) ; v1(2400,2780) 2460,2720 3188.79,2720 3200,2731.21 3200,3039.14 3205.86,3045 5229.14,3045 5235,3039.14 5235,2305.86 5229.14,2300 v1(5050,2300)
TTL_Channel_In_7: R8.1 R55.2 | length 6383.7
  Top Layer w10: v1(2130,1600) 2130,1541.21 2200,1471.21 R55.2@2200,1430 ; v1(2330,2690) 2335,2695 2335,2845 v1(2340,2850) ; v1(5100,2200) R8.1@5168.5,2200
  Bottom Layer w10: v1(2130,1600) 2133.28,1596.72 2133.28,1566.72 2180,1520 2180,1482.43 2197.43,1465 2360,1465 2360,2140 2430,2210 2430,2590 2383.28,2636.72 2353.28,2636.72 2337.65,2652.35 2337.65,2682.35 v1(2330,2690) ; v1(2340,2850) 2444.14,2850 2450,2844.14 2450,2775 2490,2735 3179.14,2735 3185,2740.86 3185,3054.14 3190.86,3060 5244.14,3060 5250,3054.14 5250,2265.86 5244.14,2260 5110,2260 5100,2250 v1(5100,2200)
UPDI: R70.1 R86.2 | length 538.1
  Top Layer w10: R86.2@1360,1081.5 v1(1360,1240) ; v1(1500,1260) 1500,1370 1551.5,1421.5 R70.1@1600,1421.5
  Bottom Layer w10: v1(1360,1240) 1365.86,1240 1385.86,1260 v1(1500,1260)
pads on no net: R125.2

## Polygon pours and split planes (outlines as drawn)
no net on Bottom Layer "NONET_L04_P002" (solid, pour order 2): 0,4000 5600,4000 5600,0 0,0
no net on Top Layer "NONET_L01_P001" (solid, pour order 1): 0,4000 5600,4000 5600,0 0,0
+5 on Plane(Power) (split plane): 5579.9,20.1 20.1,20.1 20.1,3979.9 5579.9,3979.9
GND on Plane(Gnd) (split plane): 5579.9,20.1 20.1,20.1 20.1,3979.9 5579.9,3979.9

## Silkscreen, mask and mechanical layers (free items; w line width, h text height)
Top Overlay:
  lines w10: 717.5,3595 2282.5,3595 2282.5,3695 717.5,3695 717.5,3595 ; 719,3475 1529,3475 1529,3575 719,3575 719,3475 ; 1545,3475 2280,3475 2280,3575 1545,3575 1545,3475 ; 2297.5,3475 3212.5,3475 3212.5,3575 2297.5,3575 2297.5,3475 ; 2300.5,3595 3215.5,3595 3215.5,3695 2300.5,3695 2300.5,3595 ; 3230,3475 3630,3475 3630,3575 3230,3575 3230,3475 ; 3230,3595 3630,3595 3630,3695 3230,3695 3230,3595 ; 3645,3475 4045,3475 4045,3575 3645,3575 3645,3475 ; 3645,3595 4045,3595 4045,3695 3645,3695 3645,3595 ; 3770,1360 4770,1360 4770,1460 3770,1460 3770,1360 ; 3770,1475 4770,1475 4770,1575 3770,1575 3770,1475 ; 3770,2620 4770,2620 4770,2720 3770,2720 3770,2620 ; 3770,2735 4770,2735 4770,2835 3770,2835 3770,2735
  text "ABS Data Systems, Inc, (c) Copyright 2025" at 1410,3829.99 h60
  text "Shift Register" at 2510,3623.33 h40
  text "CPU Bus and Control" at 1140,3620 h40
  text "75ALS194" at 3280,3620 h40
  text "Power" at 3760,3620 h40
  text "Int" at 1575,3501.5 h40
  text "3.3V" at 3695,3501.5 h40
  text "D7" at 745,3500 h40
  text "D6" at 846.9,3500 h40
  text "D5" at 948.81,3500 h40
  text "D4" at 1050.71,3500 h40
  text "D3" at 1152.62,3500 h40
  text "D2" at 1254.52,3500 h40
  text "D1" at 1356.42,3500 h40
  text "D0" at 1445,3500 h40
  text "Rst" at 1728.33,3500 h40
  text "CS" at 1888.33,3500 h40
  text "RD" at 2021.66,3500 h40
  text "WR" at 2155,3500 h40
  text "OE" at 2340,3500 h40
  text "CLR" at 2457.52,3500 h40
  text "RCLK" at 2615.03,3500 h40
  text "SRCLK" at 2812.52,3500 h40
  text "Data" at 3050,3500 h40
  text "Enable" at 3320,3500 h40
  text "5V" at 3900,3500 h40
  text "P/N Dig Input 32958" at 4110,3129.99 h60
  text "Version 1.1" at 4110,3010 h60
  text "Input Source (TTL = On)" at 3840,2773.33 h40
  text "D7" at 3800,2650 h40
  text "D6" at 3928.54,2650 h40
  text "D5" at 4057.09,2650 h40
  text "D4" at 4185.63,2650 h40
  text "D3" at 4314.17,2650 h40
  text "D2" at 4442.71,2650 h40
  text "D1" at 4571.26,2650 h40
  text "D0" at 4679.81,2650 h40
  text "Input States" at 4060,1513.33 h40
  text "D7" at 3800,1390 h40
  text "D6" at 3928.54,1390 h40
  text "D5" at 4057.09,1390 h40
  text "D4" at 4185.63,1390 h40
  text "D3" at 4314.17,1390 h40
  text "D2" at 4442.71,1390 h40
  text "D1" at 4571.26,1390 h40
  text "D0" at 4679.81,1390 h40
Mechanical 1:
  lines w10: 4000,0 5600,0 ; 5600,0 5600,4000 ; 5600,0 0,0 0,4000 5600,4000 ; 5600,0 5600,4000